# Altium PCB PCB1.PcbDoc
Units mil, origin at the board's own origin, x right, y up, seen from the top; angles counter-clockwise.
Board outline 3595.03 x 2435.03 mil, 2 copper layers (Top Layer, Bottom Layer); 30 components, 19 nets, 119 pads, 0 vias.
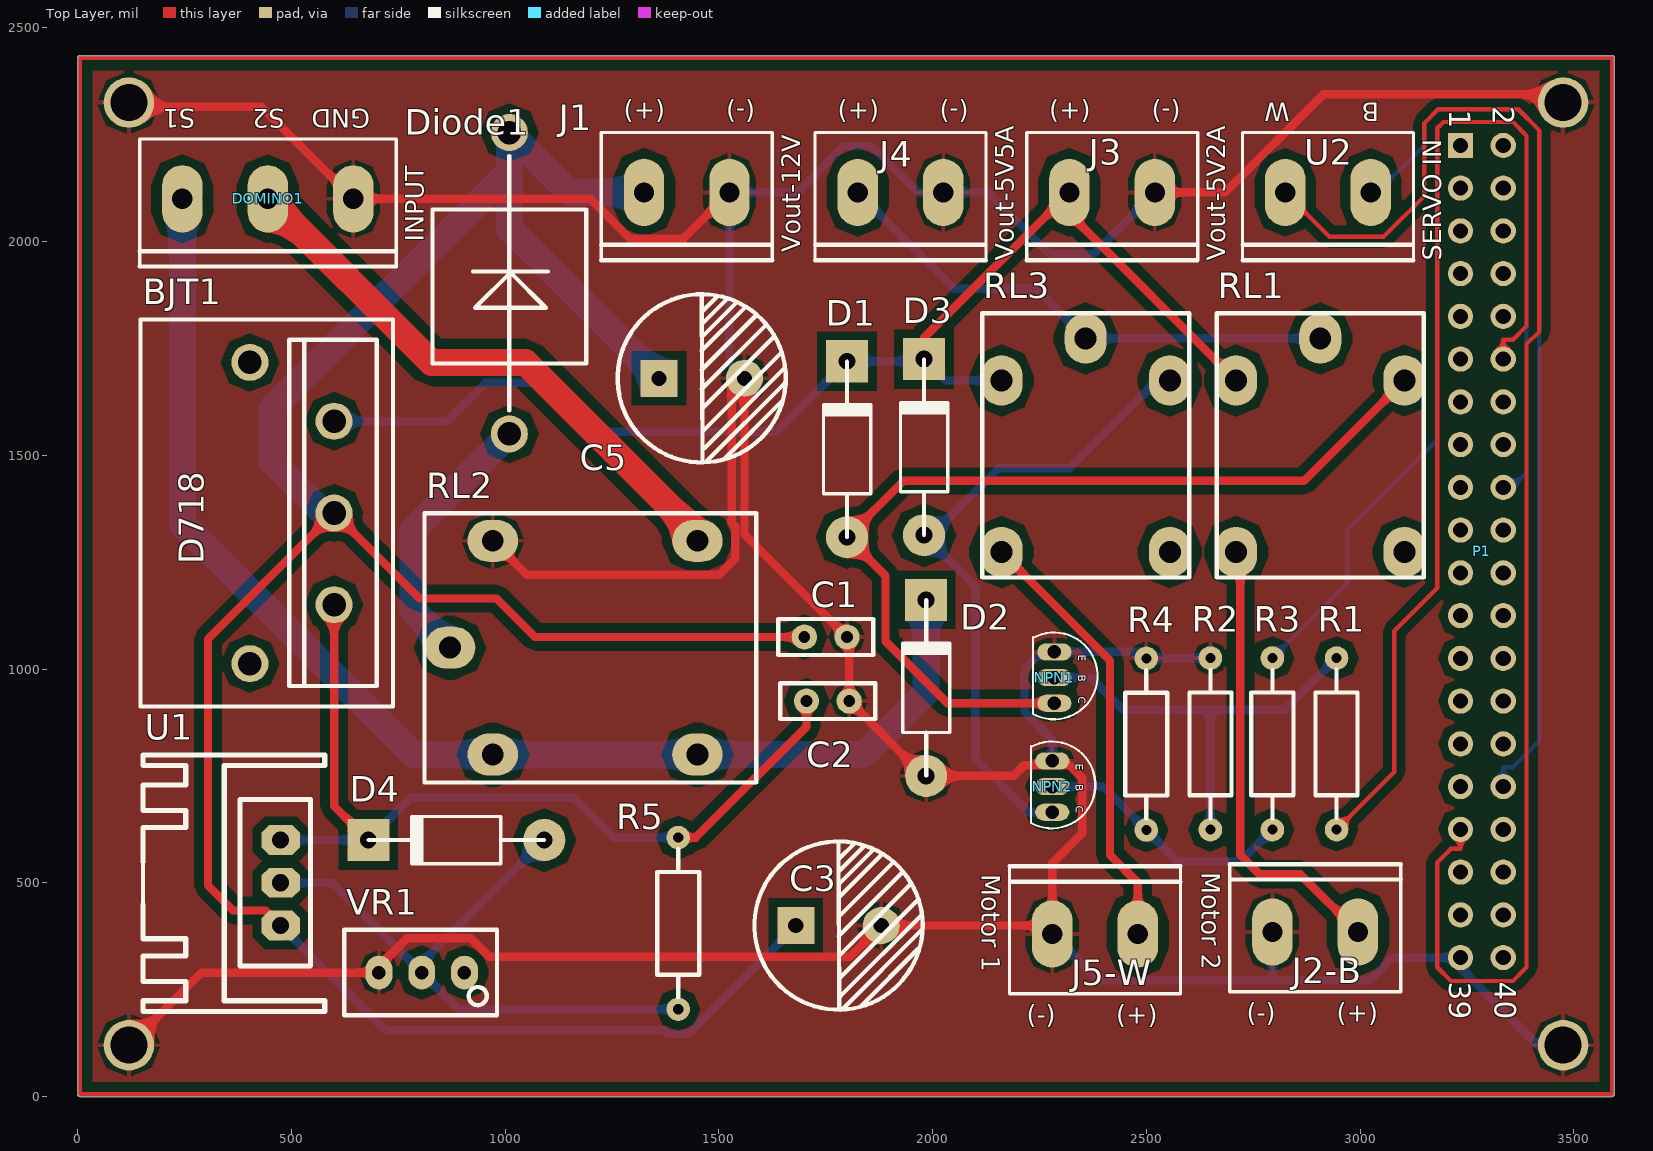
[diagram p0: Top Layer view]
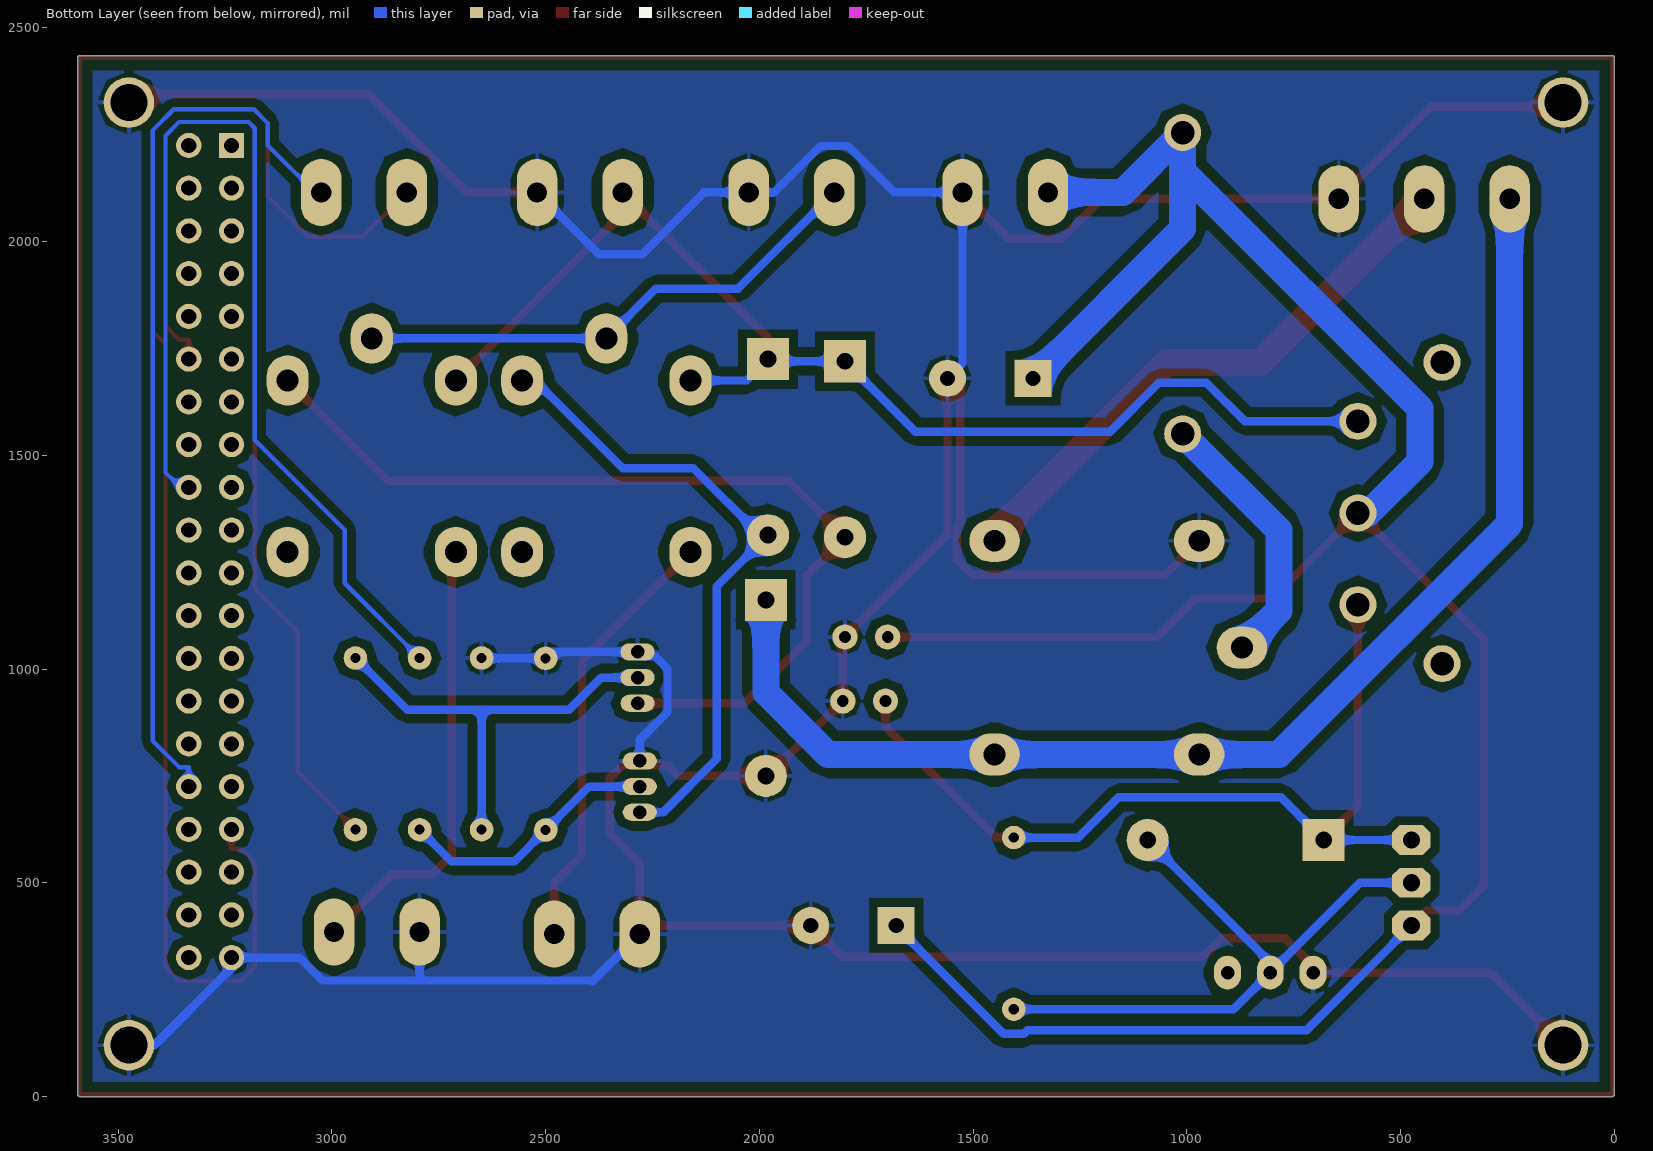
[diagram p1: Bottom Layer view, seen from below]
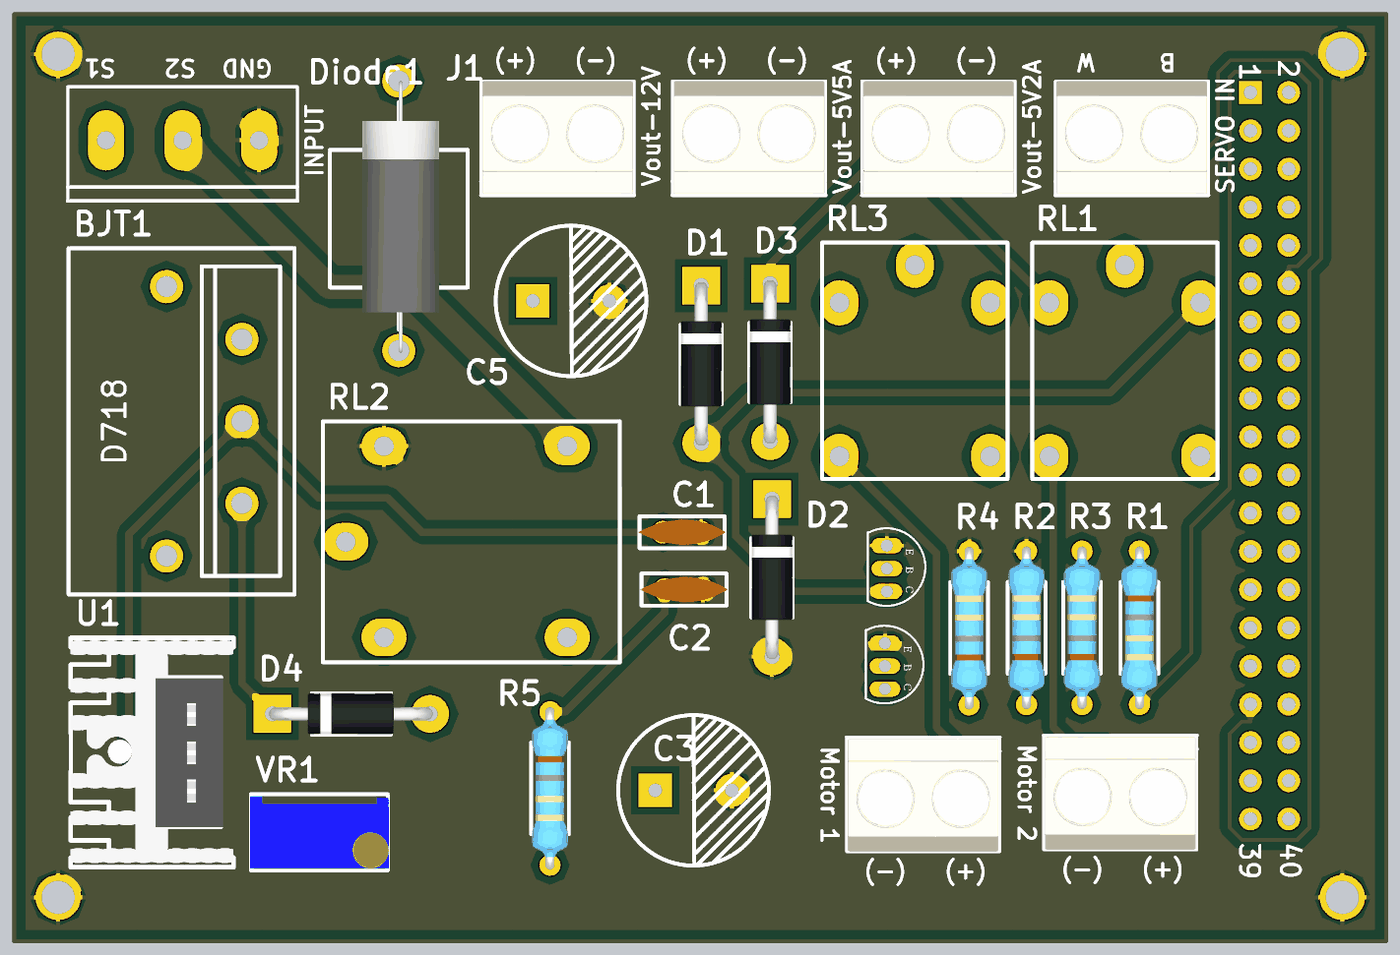
[diagram p2: 3D render of the assembled board from above, using the file's embedded part models]

## Layer stack, top to bottom
Top Solder: solder mask 0.4, Solder Resist, Dk 3.5
Top Layer: signal copper 1.4
Dielectric 1: dielectric 12.6, FR-4, Dk 4.8
Bottom Layer: signal copper 1.4
Bottom Solder: solder mask 0.4, Solder Resist, Dk 3.5

## Board outline
-0.01,5 -0.02,2295 -0.02,2430 cw(c5,2430) 5,2435.02 3590,2435.02 cw(c3590,2430) 3595.02,2430 3595.02,5 cw(c3590,5) 3590,-0.01 5,-0.01 cw(c5,5)

## Design rules (kind name [scope] priority, off if disabled: settings)
Clearance [All] p1: gap=20 ignorepadtopadclearanceinfootprint=FALSE
PolygonConnect [All] p1: connectstyle=Relief reliefconductorwidth=10 reliefentries=4 polygonreliefangle="90 Angle" airgapwidth=10
RoutingVias [All] p1: holewidth=28 width=50 viastyle="Through Hole" minholewidth=28 minwidth=50 maxholewidth=28 maxwidth=50
SilkToSilkClearance [IsText] p1: silktosilkclearance=10
SolderMaskExpansion [All] p1: expansion=4
Width [All] p1: maxlimit=62.99 minlimit=10 preferedwidth=19.68
29 further rules are at their usual default settings.

## Components (designator, comment, footprint, x,y, rotation, side; value= is the part's Value field where it differs from the comment)
BJT1 "D718" 2sb688 600,1150.43 r90 top
C1 "104" "tu gom" 1750,1075 r0 top
C2 "104" "tu gom" 1755,925 r0 top
C3 "1000uF" "tu hoa 13mm" 1680,401 r0 top
C5 "1000uF" "tu hoa 13mm" 1360,1681 r0 top
D1 "1N4007" DO-41 1810,2494.09 r90 top
D2 "1N4007" DO-41 1995,1935.91 r90 top
D3 "1N4007" DO-41 1990,2499.09 r90 top
D4 "1N4007" DO-41 -94.09,610 r180 top
Diode1 "Diode 10A" "Diode 6A10" 1010,1550 r90 top
DOMINO1 "DOMINO 3S" "DOMINO 3S" 245,2100 r0 top
J1 "Vout 12V" "Domino 2M" 1475,2115 r90 top
J2-B "CON.Domino2" "Domino 2M" 2845,385 r270 top
J3 "Vout 5V" "Domino 2M" 2470,2115 r90 top
J4 "Vin 5V" "Domino 2M" 1975,2115 r90 top
J5-W "CON.Domino2" "Domino 2M" 2330,380 r270 top
NPN1 "2N2222" PCBComponent_1 2295,790 r270 top
NPN2 "2N2222" PCBComponent_1 2290,535 r270 top
P1 "Header 20X2H" HDR2X20H 3235,2225 r270 top
R1 "1k" "tro vach 1/4w" 2945,825 r90 top
R2 "10k" "tro vach 1/4w" 2650,825 r270 top
R3 "1k" "tro vach 1/4w" 2795,825 r270 top
R4 "10k" "tro vach 1/4w" 2500,824.21 r270 top
R5 "440" "tro vach 1/4w" 1405,405 r90 top
RL1 "Relay 5V" "PCBComponent_1 - duplicate" 2906.85,1773.43 r180 top value="Relay ?V - 10A"
RL2 "Relay 12V" RELAY5PIN-10A 831.26,1001 r270 top value="Relay ?V - 10A"
RL3 "Relay 5V" "PCBComponent_1 - duplicate" 2358.15,1773.43 r180 top value="Relay ?V - 10A"
U1 "LM317" QTO-220H3 475,400 r90 top
U2 "DOMINO 2B" "DOMINO 2B" 3025,2115 r90 top
VR1 "5K" RVAR10K 805,290 r180 top

## Footprints (in the part's own frame and the unit in brackets; to place one, negate y for a bottom-side part, rotate by r counter-clockwise, add the part's x,y. Pads: shape width x height; smd on the part's side, far side on the other; paste and mask are expansions set on the pad)
2sb688 [mm]
  round 2.2 hole 1.4: 1(0,0) 2(5.45,0) 3(10.9,0) 4(-3.5,5) 5(14.4,5)
  silkscreen extent -6.05,-3.5 16.95,11.5
"Diode 6A10" [mm]
  round 2.2 hole 1.4: 1(0,0) 2(17.907,0)
  silkscreen extent 1.4,-4.57 16.51,4.57, body extent -0.13,-2.67 17.91,2.41, height 5.98
DO-41 [mm] "Diode pitch=300mils"
  round 2.5 hole 1: 1(-30.122,0.254)
  rect 2.5x2.5 hole 1: 2(-19.662,0.254)
  silkscreen extent -30.1,-1.15 -19.68,1.65, body extent -30.29,-1.11 -19.43,1.62, height 3.36
"DOMINO 2B" [mm]
  oval 4x2.4 hole 1.2: 1(0,5.08) 2(0,0)
  silkscreen extent -4.03,-2.54 3.56,7.62, body extent -3.94,-2.46 3.56,7.54, height 10
"Domino 2M" [mm]
  oval 4x2.4 hole 1.2: 1(0,3.81) 2(0,-1.27)
  silkscreen extent -4.03,-3.81 3.56,6.35, body extent -3.94,-3.73 3.56,6.27, height 10
"DOMINO 3S" [mm] "3 terminal 5.04 spacing"
  oval 2.4x4 hole 1.2: 1(0,0) 2(5.08,0) 3(10.16,0)
  silkscreen extent -2.54,-4.03 12.7,3.56
HDR2X20H [mm] "Connector; Header; 20x2 Position; Right Angle"
  rect 1.5x1.5 hole 0.9: 1(0,0)
  round 1.5 hole 0.9: 2(0,2.54) 3(2.54,0) 4(2.54,2.54) 5(5.08,0) 6(5.08,2.54) 7(7.62,0) 8(7.62,2.54) 9(10.16,0) 10(10.16,2.54) 11(12.7,0) 12(12.7,2.54) 13(15.24,0) 14(15.24,2.54) 15(17.78,0) 16(17.78,2.54) 17(20.32,0) 18(20.32,2.54) 19(22.86,0) 20(22.86,2.54) 21(25.4,0) 22(25.4,2.54) 23(27.94,0) 24(27.94,2.54) 25(30.48,0) 26(30.48,2.54) 27(33.02,0) 28(33.02,2.54) 29(35.56,0) 30(35.56,2.54) 31(38.1,0) 32(38.1,2.54) 33(40.64,0) 34(40.64,2.54) 35(43.18,0) 36(43.18,2.54) 37(45.72,0) 38(45.72,2.54) 39(48.26,0) 40(48.26,2.54)
PCBComponent_1 [mil]
  oval 40x80 hole 31.49 unplated: 1(-250,-10) 2(-190,-10) 3(-130,-10)
  silkscreen extent -296,-60 -92,91, body extent -280,-58 -102,80, height 315
"PCBComponent_1 - duplicate" [mm]
  oval 2.5x3 hole 1.3: 1(0,0) 2(-5,12.7) 3(5,12.7) 4(-5,2.5) 5(5,2.5)
  silkscreen extent -6.15,-1.5 6.15,14.2
QTO-220H3 [mil] "TO-220 1-2-3"
  oct 70x90 hole 40: 1(0,0) 2(100,0) 3(200,0)
  silkscreen extent -201,-103 399,322, body extent -190,-102 392,323, height 984
RELAY5PIN-10A [mm]
  oval 2.5x3 hole 1.3: 1(-1.245,1.016) 2(-7.595,15.716) 3(5.105,15.716) 4(-7.595,3.556) 5(5.105,3.556)
  silkscreen extent -9.25,-0.51 6.76,19.21, body extent -8.74,-0.51 6.25,18.16, height 16
RVAR10K [mm] "Bien tro vi chinh"
  oval 1.6x2 hole 0.8: 1(-2.54,0) 2(0,0) 3(2.54,0)
  silkscreen extent -4.47,-2.54 4.6,2.54, body extent -4.54,-2.4 4.66,2.4, height 12.02
"tro vach 1/4w" [mm]
  round 1.4 hole 0.6: 1(-5.1,0) 2(5.1,0)
  silkscreen extent -4.39,-1.25 4.42,1.25, body extent -5.38,-1.2 5.38,1.2, height 2.41
"tu gom" [mm] "Tu gom mini"
  round 1.5 hole 0.7: 1(-1.27,0) 2(1.27,0)
  silkscreen extent -2.82,-1.07 2.82,1.07, body extent -2.92,-0.85 2.92,0.85, height 6.12
"tu hoa 13mm" [mm]
  rect 2.2x2.2 hole 0.9: 1(0,-0.025)
  round 2.2 hole 0.9: 2(5.08,-0.025)
  silkscreen extent -2.46,-5.02 7.54,4.97

## Part data
BJT1: library part "BJT 2sb688"
C1 C2: library part "Tu gom 104 50V", "C?m", Chung_Loai=C?m, Don_Vi=Con, Ma_Hang=MH004761, So_Chan=2, Ten_Linh_Kien="T? g?m 104 100nF 50V"
C3 C5: library part "Tu Hoa 1000uF 25V 13x21", "C?m", Chung_Loai=C?m, Don_Vi=Con, Ma_Hang=MH002315, So_Chan=2, Ten_Linh_Kien="T? Hóa 1000uF 25V 13x21MM"
D1 D2 D3 D4: library part "Diode 1N4007", "1 Amp General Purpose Rectifier", Code_JEDEC=DO-204-AL, ComponentLink1Description="Manufacturer Link", ComponentLink1URL=http://www.fairchildsemi.com/, ComponentLink2Description=Datasheet, ComponentLink2URL=http://www.fairchildsemi.com/ds/1N%2F1N4001.pdf, DatasheetVersion=1998, LatestRevisionDate=17-Jul-2002, LatestRevisionNote="Re-released for DXP Platform.", PackageDescription="Diode, Axial; Body 5.2 x 2.7 mm (LxDia. max), Lead Dia. 0.86 mm (max)", PackageReference=DO-41, PackageVersion=Aug-1999, Published=8-Jun-2000, Publisher="Altium Limited"
Diode1: library part "Diode 6A10"
J1: library part CON.Domino2, "2 pins Domino Header", ComponentLink1Description="Digikey Part link", ComponentLink2Description="Open DataSheet", ComponentLink2URL=H:\LIBRARY\LIBRARY.Datasheet\, Price=2000VND, Publisher="Hoang Nguyen"
J2-B J5-W: "2 pins Domino Header", ComponentLink1Description="Digikey Part link", ComponentLink2Description="Open DataSheet", ComponentLink2URL=H:\LIBRARY\LIBRARY.Datasheet\, Price=2000VND, Publisher="Hoang Nguyen"
J3: library part CON.Domino2, "Source DC 5V for Servo", ComponentLink1Description="Digikey Part link", ComponentLink2Description="Open DataSheet", ComponentLink2URL=H:\LIBRARY\LIBRARY.Datasheet\, Price=2000VND, Publisher="Hoang Nguyen"
J4: library part CON.Domino2, "Source DC from MODULE", ComponentLink1Description="Digikey Part link", ComponentLink2Description="Open DataSheet", ComponentLink2URL=H:\LIBRARY\LIBRARY.Datasheet\, Price=2000VND, Publisher="Hoang Nguyen"
NPN1 NPN2: library part Component_1
P1: "Header, 20-Pin, Dual row, Right Angle", LatestRevisionDate=17-Jul-2002, LatestRevisionNote="Re-released for DXP Platform.", Publisher="Altium Limited"
R1 R3 R5: library part "Tro Vach 1/4W 5% 1k", "C?m", Chung_Loai=C?m, Don_Vi=Con, Ma_Hang=MH007390, So_Chan=2, Ten_Linh_Kien="Tr? V?ch 1/4w 5% 1k"
R2 R4: library part "Tro Vach 1/4W 1% 10k", "C?m", Chung_Loai=C?m, Don_Vi=Con, Ma_Hang=MH006349, So_Chan=2, Ten_Linh_Kien="Tr? V?ch 1/4w 1% 10k"
RL1 RL2 RL3: library part "Relay 10A", "C?m"
U1: library part 78xx, "LM78xx, on ap +"
VR1: library part "Bien Tro Tinh Chinh 1K", "C?m", Chung_Loai=C?m, Don_Vi=Con, Ma_Hang=MH003234, Ten_Linh_Kien="Bi?n Tr? VR 102-1K 3296W"

## Free pads (board coordinates)
  round 118.11 hole 86.61: 100(120,120) 100(120,2325) 100(3475,120) 100(3475,2325)

## Nets (pads, with @x,y where several pads share a name; then routed paths per layer and width w, separated by ;. In a path a pad name is that pad's centre, name@x,y a point inside that pad or via, vN(x,y) a via of type N, cw(c..) or ccw(c..) an arc to the next point about the centre after c; other vN are vias at no path point)
"Black Cam": P1.33 U2.1 | length 3445.4
  Top Layer w10: U2.1 2928.74,2011.26 3054.92,2011.26 3150.47,2106.81 3150.47,2277.31 3182.69,2309.53 3370.01,2309.53 3419.53,2260.01 3419.53,1789.99 3389.53,1759.99 3389.53,302.41 3357.59,270.47 3212.41,270.47 3180.47,302.41 3180.47,547.59 3212.41,579.53 3235,579.53 P1.33
GND: C1.2 C2.2 C3.2 C5.2 D2.1 DOMINO1.3 J1.2 J2-B.2 J3.2 J4.2 J5-W.2 NPN1.1 NPN2.1 P1.39 pad.100 R2.1 R4.1 RL2.4 VR1.3 | length 11807.7
  Top Layer w19.68: pad.100@120,120 290,290 VR1.3 705,305 770,370 919.62,370 962.77,326.85 1806.85,326.85 C3.2 2260,400 J5-W.2 2280,545.32 2349.84,615.16 2349.84,745.65 2320.65,774.84 2280,774.84 NPN2.1 2269.84,774.84 2214.51,774.84 2189.67,750 D2.1 1980,750 C2.2 1805,1070 C1.2 1560,1315 C5.2 1530,1650 1530,1341.64 1538.9,1332.75 1538.9,1258.36 1501.49,1220.94 1050.31,1220.94 RL2.4 ; pad.100@120,2315 430,2315 DOMINO1.3 1199.49,2100 1293.07,2006.42 1416.42,2006.42 J1.2 ; J3.2 2684.49,2115 2913.86,2344.37 3504.37,2344.37 pad.100@3485,2330
  Bottom Layer w19.68: C5.2 1525,1715 J1.2 1684.49,2115 1793.07,2223.58 1856.93,2223.58 1965.51,2115 J4.2 2130,2115 2275,1970 2375,1970 J3.2 ; J5-W.2 2390,270 2390,271.42 2785,271.42 ; NPN2.1 2280,834.51 2215.16,899.35 2215.16,1000.65 2244.35,1029.84 2280,1029.84 2280,1035 NPN1.1 2485,1040 R4.1 2649.21,1025 R2.1 ; J2-B.2 2795,281.42 2785,271.42 ; pad.100@3475,120 3415.63,120 3235,300.63 P1.39 3075.51,325 3021.93,271.42 2785,271.42
NetBJT1_1: BJT1.1 C2.1 D4.2 R5.2 U1.3 | length 2061.4
  Top Layer w19.68: BJT1.1 600,680 D4.2 ; R5.2 1445.79,605.79 1705,865 C2.1
  Bottom Layer w19.68: U1.3 D4.2 780,700 1160,700 1254.21,605.79 R5.2
NetD1_1: D1.1 NPN1.3 RL1.4 | length 2205.5
  Top Layer w19.68: NPN1.3@2295.16,930.16 NPN1.3 2035,920 1890,1065 1890,1218.19 D1.1 1931.81,1440 2868.7,1440 RL1.4
NetD3_1: D3.1 NPN2.3 RL3.4 | length 1529.5
  Bottom Layer w19.68: NPN2.3 2225,665 2100,790 2100,1193.19 D3.1 1998.19,1313.19 2155,1470 2320,1470 2525,1675 RL3.4
NetD4_1: D4.1 R5.1 U1.2 VR1.2 | length 1481.3
  Bottom Layer w19.68: U1.2 595,500 VR1.2 ; D4.1 805,313.19 VR1.2 ; R5.1 890.79,204.21 VR1.2
NetDiode1_1: Diode1.1 RL2.1 | length 628.9
  Bottom Layer w62.99: RL2.1 785,1136.26 785,1325 Diode1.1
NetJ2-B_1: J2-B.1 RL1.3 | length 1062.1
  Top Layer w19.68: RL1.3 2720,1263.43 2720,565 2765,520 2860,520 J2-B.1
NetJ5-W_1: J5-W.1 RL3.3 | length 1025.4
  Top Layer w19.68: RL3.3 2415,1019.72 2415,565 2480,500 J5-W.1
NetNPN1_2: NPN1.2 R1.2 R2.2 | length 1021.9
  Bottom Layer w19.68: NPN1.2 2370,980 2445,905 2650,905 ; R2.2 2650,905 ; R1.2 2824.21,905 2650,905
NetNPN2_2: NPN2.2 R3.2 R4.2 | length 618.2
  Bottom Layer w19.68: NPN2.2 2398.43,725 R4.2 2573.43,550 2720.79,550 R3.2
"S1 (Main)": D2.2 DOMINO1.1 RL2.3 RL2.5 | length 3016.3
  Bottom Layer w62.99: DOMINO1.1@260.75,2100 DOMINO1.1 245,1340 785,800 RL2.5 RL2.3 1840,800 1985,945 D2.2
S2: DOMINO1.2 RL2.2 | length 1345.2
  Top Layer w62.99: DOMINO1.2 828.07,1716.93 1048.07,1716.93 1450,1315 RL2.2
"Signal Moto B": P1.12 R1.1 | length 2525
  Top Layer w10: R1.1 3080,759.21 3080,1088.9 3180.47,1189.37 3180.47,2264.88 3195.12,2279.53 3357.59,2279.53 3389.53,2247.59 3389.53,1802.41 3357.59,1770.47 3335,1770.47 P1.12
"Signal Moto W": P1.18 R3.1 | length 2484
  Bottom Layer w10: R3.1 2970,1200.79 2970,1325 3180.47,1535.47 3180.47,2264.88 3195.12,2279.53 3357.59,2279.53 3389.53,2247.59 3389.53,1459.53 3355,1425 P1.18
Vout~5V~2A: BJT1.3 D1.2 D3.2 J3.1 RL1.5 RL3.5 | length 2869.9
  Top Layer w19.68: D3.2 1980,1775 J3.1 2320,2065 RL1.5
  Bottom Layer w19.68: BJT1.3 864.57,1579.57 955,1670 1065,1670 1180,1555 1635,1555 D1.2 1975,1720 D3.2 2030,1675 RL3.5
Vout~5V~5A: J4.1 RL1.1 RL3.1 | length 1223.3
  Bottom Layer w19.68: J4.1 2050,1890 2241.57,1890 RL3.1 RL1.1
Vout~12V: BJT1.2 C1.1 C3.1 C5.1 Diode1.2 J1.1 U1.1 | length 6031
  Top Layer w19.68: U1.1 439.84,435.16 363.42,435.16 305,493.58 305,1070 BJT1.2 800,1165 980,1165 1070,1075 C1.1
  Bottom Layer w19.68: U1.1 720,155 1373.03,155 1381.22,146.81 1428.78,146.81 1680,398.03 C3.1
  Bottom Layer w62.99: BJT1.2 575,1365 455,1485 455,1610 1010,2165 1010,2030 C5.1 ; 1010,2170 Diode1.2 1150,2115 J1.1
"White Cam": P1.32 U2.2 | length 2109.2
  Bottom Layer w10: U2.2 3040,2115 3150.47,2225.47 3150.47,2277.31 3182.69,2309.53 3370.01,2309.53 3419.53,2260.01 3419.53,832.41 3357.59,770.47 3335,770.47 P1.32
pads on no net: BJT1.4 BJT1.5 P1.1 P1.2 P1.3 P1.4 P1.5 P1.6 P1.7 P1.8 P1.9 P1.10 P1.11 P1.13 P1.14 P1.15 P1.16 P1.17 P1.19 P1.20 P1.21 P1.22 P1.23 P1.24 P1.25 P1.26 P1.27 P1.28 P1.29 P1.30 P1.31 P1.34 P1.35 P1.36 P1.37 P1.38 P1.40 RL1.2 RL3.2 VR1.1
copper on no net: | length 12020
  Top Layer w10: 5,5 3590,5 3590,2430 5,2430 5,2295 5,5

## Polygon pours and split planes (outlines as drawn)
no net on Drill Drawing (solid): 3605,1440
GND on Top Layer "Top Poly" (solid, remove dead copper, pour order 24): 35,2400 35,35 3560,35 3560,2400
GND on Top Layer "Top Poly" (solid, remove dead copper, pour order 10): 25,55
GND on Top Layer "Top Poly" (solid, remove dead copper, pour order 4): 115,2385
GND on Bottom Layer "Top Poly" (solid, remove dead copper, pour order 22): 35,2400 3560,2400 3560,35 35,35
GND on Bottom Layer "Top Poly" (solid, remove dead copper, pour order 18): 1560,-990

## Text inside footprints (layer, text, board x,y; h text height)
DOMINO1: Top Overlay "S2" at 485,2310 h43.31 r180; Top Overlay "S1" at 275,2310 h43.31 r180; Top Overlay "INPUT" at 810,2000 h43.31 r90; Top Overlay "GND" at 685,2310 h43.31 r180
J1: Top Overlay "(-)" at 1585,2325 h43.31 r180; Top Overlay "(+)" at 1375,2325 h43.31 r180; Top Overlay "Vout-12V" at 1690,1975 h43.31 r90
J2-B: Top Overlay "(-)" at 2735,175 h43.31; Top Overlay "(+)" at 2945,175 h43.31; Top Overlay "Motor 2" at 2630,525 h43.31 r270
J3: Top Overlay "(-)" at 2580,2325 h43.31 r180; Top Overlay "(+)" at 2370,2325 h43.31 r180; Top Overlay "Vout-5V2A" at 2685,1955 h43.31 r90
J4: Top Overlay "(-)" at 2085,2325 h43.31 r180; Top Overlay "(+)" at 1875,2325 h43.31 r180; Top Overlay "Vout-5V5A" at 2190,1955 h43.31 r90
J5-W: Top Overlay "(-)" at 2220,170 h43.31; Top Overlay "(+)" at 2430,170 h43.31; Top Overlay "Motor 1" at 2115,520 h43.31 r270
NPN1: Top Overlay "C" at 2334.37,934.88 h30 r270; Top Overlay "B" at 2334.37,986.06 h30 r270; Top Overlay "E" at 2334.37,1033.31 h30 r270
NPN2: Top Overlay "C" at 2329.37,679.88 h30 r270; Top Overlay "B" at 2329.37,731.06 h30 r270; Top Overlay "E" at 2329.37,778.31 h30 r270
P1: Top Overlay "2" at 3310,2316 h50 r270; Top Overlay "1" at 3209,2308 h50 r270; Top Overlay "39" at 3209,268 h50 r270; Top Overlay "40" at 3315,269 h50 r270
U2: Top Overlay "B" at 3045,2325 h43.31 r180; Top Overlay "W" at 2835,2325 h43.31 r180; Top Overlay "SERVO IN" at 3190,1955 h43.31 r90